# EAGLE board SpecialistEE20 (EAGLE 6.4)
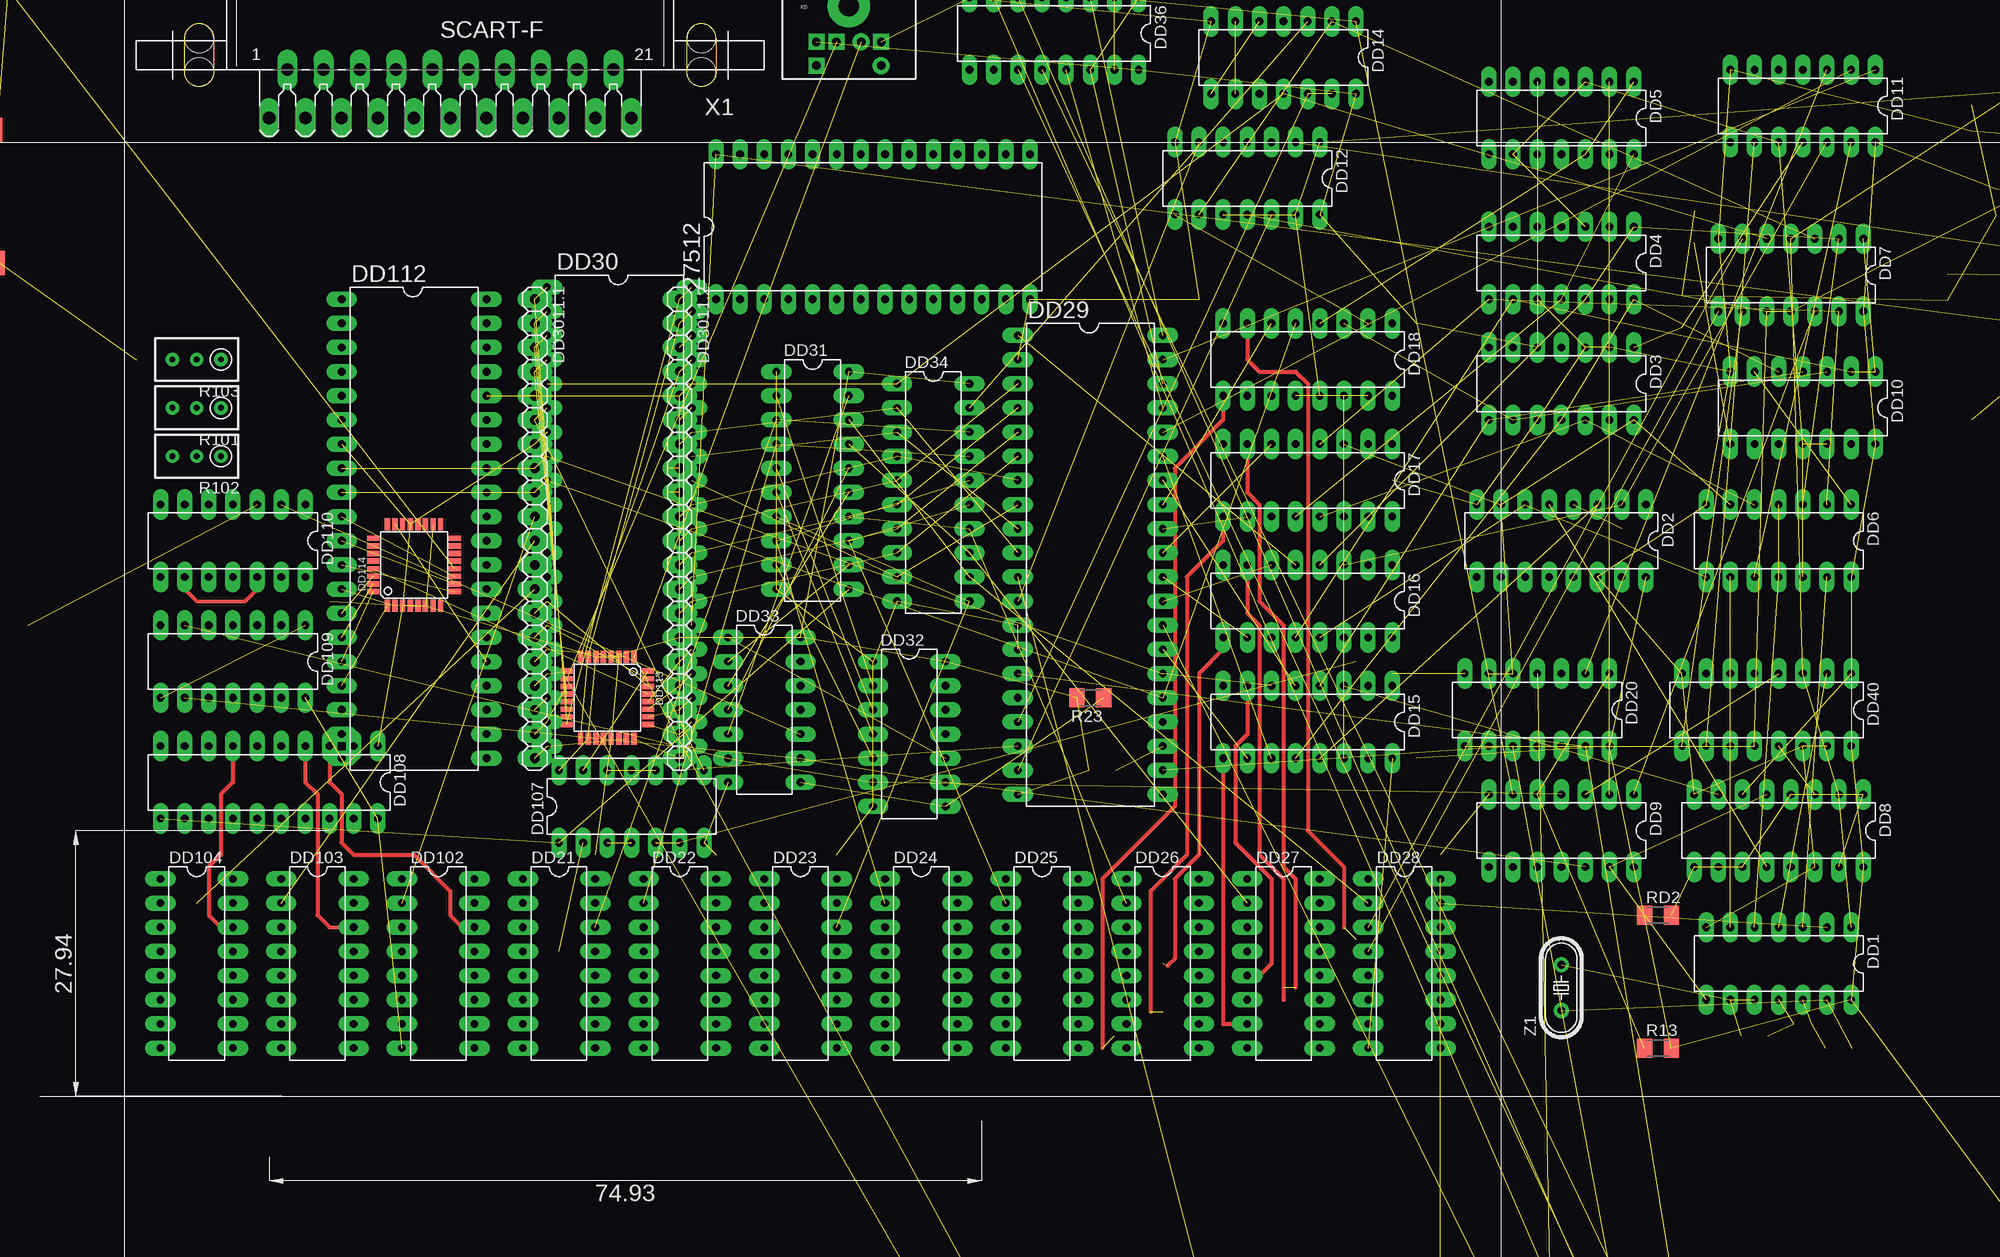
[diagram p0: board, top side]
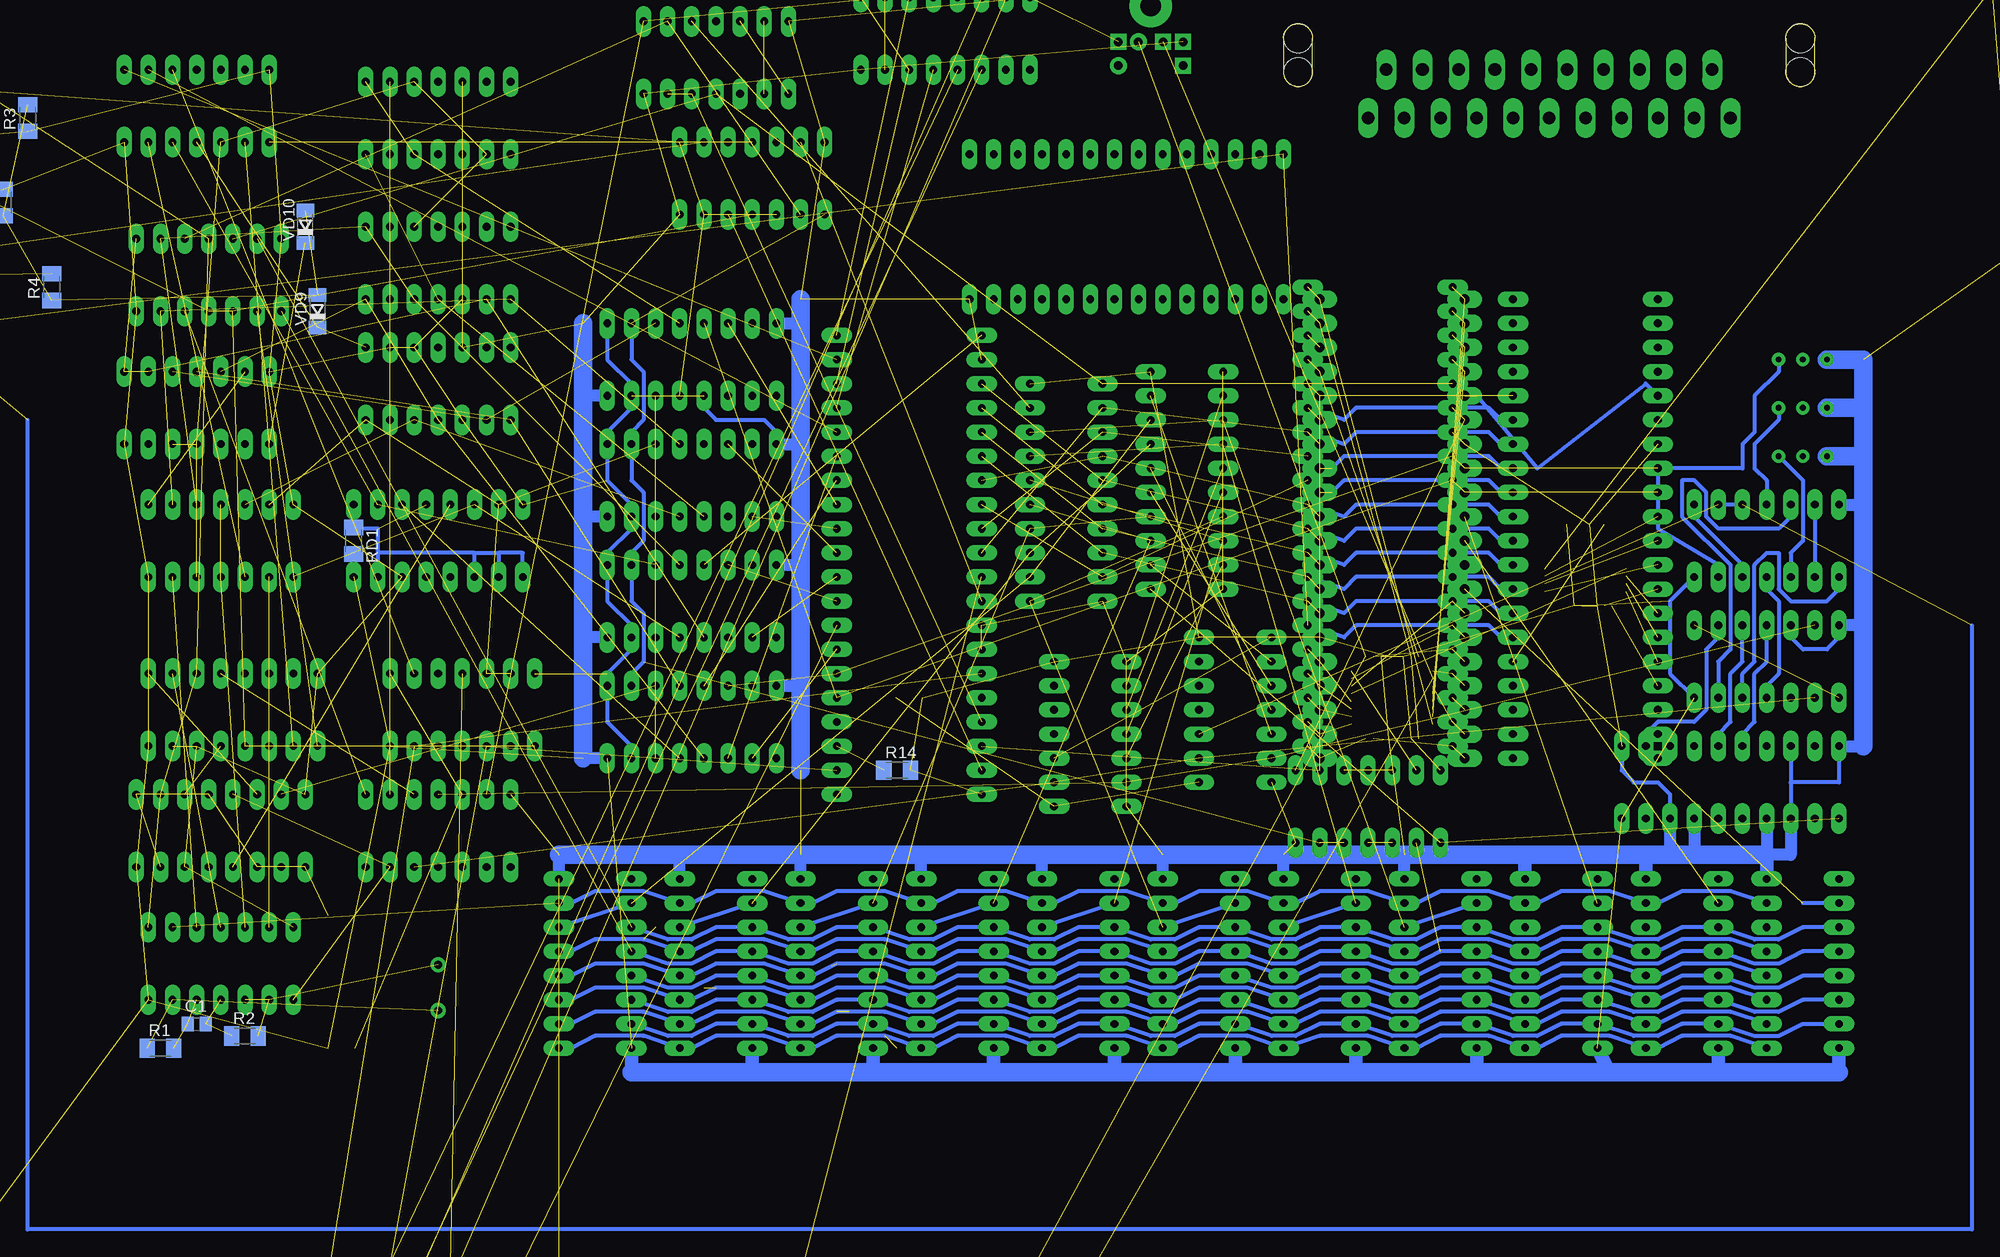
[diagram p1: board, bottom side, seen from below]

Size 55.88 x 6.6 mm. Coordinates in mm from the lower left corner, seen from the top.
Copper layers (1*16): Top 0.035mm / dielectric 1.5mm / Bottom 0.035mm
Design rules "speccy2007": minimum track width 10mil, minimum drill 24mil, track to track 8mil, track to pad 8mil, pad to pad 8mil, via to via 8mil, smd to smd 8mil, copper to edge 40mil, drill to drill 7mil, minimum pad ring 0.4mm, minimum via ring 8mil, stop-mask expansion 4mil, vias tented up to drill 0mil, thermal gap 10mil

## Footprints (pad centres in the part's own frame; a part is rotated, then mirrored left to right if it is on the bottom)
DIL28 = drill 0.813 long: 1 -16.51,-7.62; 2 -13.97,-7.62; 3 -11.43,-7.62; 4 -8.89,-7.62; 5 -6.35,-7.62; 6 -3.81,-7.62; 7 -1.27,-7.62; 8 1.27,-7.62; 9 3.81,-7.62; 10 6.35,-7.62; 11 8.89,-7.62; 12 11.43,-7.62; 13 13.97,-7.62; 14 16.51,-7.62; 15 16.51,7.62; 16 13.97,7.62; 17 11.43,7.62; 18 8.89,7.62; 19 6.35,7.62; 20 3.81,7.62; 21 1.27,7.62; 22 -1.27,7.62; 23 -3.81,7.62; 24 -6.35,7.62; 25 -8.89,7.62; 26 -11.43,7.62; 27 -13.97,7.62; 28 -16.51,7.62
C0805 = smd 1.3 x 1.5: 1 -0.95,0; 2 0.95,0
E2,5-5 = drill 0.813 pad 1.6: + -1.27,0 | drill 0.813 pad 1.6 octagon: - 1.27,0
C1206 = smd 1.6 x 1.8: 1 -1.4,0; 2 1.4,0
DIL14 = drill 0.813 long: 1 -7.62,-3.81; 2 -5.08,-3.81; 3 -2.54,-3.81; 4 0,-3.81; 5 2.54,-3.81; 6 5.08,-3.81; 7 7.62,-3.81; 8 7.62,3.81; 9 5.08,3.81; 10 2.54,3.81; 11 0,3.81; 12 -2.54,3.81; 13 -5.08,3.81; 14 -7.62,3.81
DIL16 = drill 0.813 long: 1 -8.89,-3.81; 2 -6.35,-3.81; 3 -3.81,-3.81; 4 -1.27,-3.81; 5 1.27,-3.81; 6 3.81,-3.81; 7 6.35,-3.81; 8 8.89,-3.81; 9 8.89,3.81; 10 6.35,3.81; 11 3.81,3.81; 12 1.27,3.81; 13 -1.27,3.81; 14 -3.81,3.81; 15 -6.35,3.81; 16 -8.89,3.81
DIL40 = drill 0.813 long: 1 -24.13,-7.62; 2 -21.59,-7.62; 3 -19.05,-7.62; 4 -16.51,-7.62; 5 -13.97,-7.62; 6 -11.43,-7.62; 7 -8.89,-7.62; 8 -6.35,-7.62; 9 -3.81,-7.62; 10 -1.27,-7.62; 11 1.27,-7.62; 12 3.81,-7.62; 13 6.35,-7.62; 14 8.89,-7.62; 15 11.43,-7.62; 16 13.97,-7.62; 17 16.51,-7.62; 18 19.05,-7.62; 19 21.59,-7.62; 20 24.13,-7.62; 21 24.13,7.62; 22 21.59,7.62; 23 19.05,7.62; 24 16.51,7.62; 25 13.97,7.62; 26 11.43,7.62; 27 8.89,7.62; 28 6.35,7.62; 29 3.81,7.62; 30 1.27,7.62; 31 -1.27,7.62; 32 -3.81,7.62; 33 -6.35,7.62; 34 -8.89,7.62; 35 -11.43,7.62; 36 -13.97,7.62; 37 -16.51,7.62; 38 -19.05,7.62; 39 -21.59,7.62; 40 -24.13,7.62
DIL20 = drill 0.813 long: 1 -11.43,-3.81; 2 -8.89,-3.81; 3 -6.35,-3.81; 4 -3.81,-3.81; 5 -1.27,-3.81; 6 1.27,-3.81; 7 3.81,-3.81; 8 6.35,-3.81; 9 8.89,-3.81; 10 11.43,-3.81; 11 11.43,3.81; 12 8.89,3.81; 13 6.35,3.81; 14 3.81,3.81; 15 1.27,3.81; 16 -1.27,3.81; 17 -3.81,3.81; 18 -6.35,3.81; 19 -8.89,3.81; 20 -11.43,3.81
DIL24 = drill 0.813 long: 1 -13.97,-7.62; 2 -11.43,-7.62; 3 -8.89,-7.62; 4 -6.35,-7.62; 5 -3.81,-7.62; 6 -1.27,-7.62; 7 1.27,-7.62; 8 3.81,-7.62; 9 6.35,-7.62; 10 8.89,-7.62; 11 11.43,-7.62; 12 13.97,-7.62; 13 13.97,7.62; 14 11.43,7.62; 15 8.89,7.62; 16 6.35,7.62; 17 3.81,7.62; 18 1.27,7.62; 19 -1.27,7.62; 20 -3.81,7.62; 21 -6.35,7.62; 22 -8.89,7.62; 23 -11.43,7.62; 24 -13.97,7.62
TQFP32-08 = smd 1.27 x 0.559: 1 -4.293,2.8; 2 -4.293,2; 3 -4.293,1.2; 4 -4.293,0.4; 5 -4.293,-0.4; 6 -4.293,-1.2; 7 -4.293,-2; 8 -4.293,-2.8; 17 4.293,-2.8; 18 4.293,-2; 19 4.293,-1.2; 20 4.293,-0.4; 21 4.293,0.4; 22 4.293,1.2; 23 4.293,2; 24 4.293,2.8 | smd 0.559 x 1.27: 9 -2.8,-4.293; 10 -2,-4.293; 11 -1.2,-4.293; 12 -0.4,-4.293; 13 0.4,-4.293; 14 1.2,-4.293; 15 2,-4.293; 16 2.8,-4.293; 25 2.8,4.293; 26 2,4.293; 27 1.2,4.293; 28 0.4,4.293; 29 -0.4,4.293; 30 -1.2,4.293; 31 -2,4.293; 32 -2.8,4.293
1X20 = drill 1.016 long: 1 -24.13,0; 2 -21.59,0; 3 -19.05,0; 4 -16.51,0; 5 -13.97,0; 6 -11.43,0; 7 -8.89,0; 8 -6.35,0; 9 -3.81,0; 10 -1.27,0; 11 1.27,0; 12 3.81,0; 13 6.35,0; 14 8.89,0; 15 11.43,0; 16 13.97,0; 17 16.51,0; 18 19.05,0; 19 21.59,0; 20 24.13,0
SDCMF-10915W010 = smd 0.711 x 1.422: 1 7.366,13.462; 2 4.826,13.462; 3 2.286,13.462; 4 -0.254,13.462; 5 -2.794,13.462; 6 -5.334,13.462; 7 -7.874,13.462; 8 -9.398,13.462; 9 9.906,13.462; 10 -11.938,13.462; 11 -10.668,13.462 | smd 1.27 x 2.54: M1 12.43,11.43; M2 13.97,-2.54; M3 -13.208,-2.54; M4 -13.446,11.43 | hole 1.6: 9.906,10.414 | hole 1.1: -11.176,10.414
1X01 = drill 1.016 octagon: 1 0,0
MINI-DIN6 = drill 0.9 pad 1.676 square: 1 -1.3,-8.5; 3 -3.4,-8.5; 4 3.4,-8.5; 5 -3.4,-11 | drill 0.9 pad 1.778: 2 1.3,-8.5; 6 3.4,-11 | drill 2.2 pad 4.5: GND 0,-4.7
LED5MM = drill 0.813 octagon: A -1.27,0; K 1.27,0
M1206 = smd 1.6 x 2: 1 -1.4,0; 2 1.4,0
0411/15 = drill 0.914 octagon: 1 -7.62,0; 2 7.62,0
RTRIM3296W = drill 0.61: 1 0,-2.54; 2 0,0; 3 0,2.54
M0805 = smd 1.3 x 1.6: 1 -0.95,0; 2 0.95,0
PCB-MAIN = hole 7: 203.5,30.5; 57.5,30.5; 203.5,132; 57.5,132 | hole 12: 79.5,76.5; 184,76.5
SWITCH9X4 = drill 0.8 pad 2.184: 10 -1.587,0; 11 -1.587,2.54; 12 -1.587,-2.54; 20 1.587,0; 21 1.587,2.54; 22 1.587,-2.54
SOD80C = smd 1.4 x 1.8: A 1.7,0; C -1.7,0
DO41-10 = drill 1.118: A 5.08,0; C -5.08,0
SCART-F = drill 1.321 long: 1 19.05,5.08; 2 17.145,0; 3 15.24,5.08; 4 13.335,0; 5 11.43,5.08; 6 9.525,0; 7 7.62,5.08; 8 5.715,0; 9 3.81,5.08; 10 1.905,0; 11 0,5.08; 12 -1.905,0; 13 -3.81,5.08; 14 -5.715,0; 15 -7.62,5.08; 16 -9.525,0; 17 -11.43,5.08; 18 -13.335,0; 19 -15.24,5.08; 20 -17.145,0; 21 -19.05,5.08 | hole 3.023: 26.416,0.254; 26.416,-3.302; -26.416,0.254; -26.416,-3.302
HC49/S = drill 0.813: 1 -2.413,0; 2 2.413,0

## Placement (x,y rotation side)
27512  [DIL28]  72.39,-14.73 0 top  (outside the outline)
C1  300  [C0805]  170.18,-98.55 0 bottom  (outside the outline)
C3  2m2  [E2,5-5]  138.43,-126.49 270 top  (outside the outline)
C4  [C1206]  106.68,-126.49 270 top  (outside the outline)
C4'  [C1206]  111.76,-126.49 270 top  (outside the outline)
C5  100  [C0805]  203.2,-5.84 0 bottom  (outside the outline)
C6  68  [C0805]  203.2,6.86 0 bottom  (outside the outline)
C7  100m  [E2,5-5]  204.47,-18.54 0 top  (outside the outline)
C10  2m2  [E2,5-5]  196.85,-28.7 0 top  (outside the outline)
C11  22n  [C0805]  195.58,-19.81 0 top  (outside the outline)
DD1  К155ЛН1  [DIL14]  167.64,-92.2 180 top  (outside the outline)
DD2  К155ИЕ7  [DIL16]  144.78,-47.75 180 top  (outside the outline)
DD3  К155ИЕ5  [DIL14]  144.78,-31.24 180 top  (outside the outline)
DD4  К155ИЕ5  [DIL14]  144.78,-18.54 180 top  (outside the outline)
DD5  К155ИЕ5  [DIL14]  144.78,-3.3 180 top  (outside the outline)
DD6  К155ЛЕ1  [DIL14]  167.64,-47.75 180 top  (outside the outline)
DD7  К155ЛА4  [DIL14]  168.91,-19.81 180 top  (outside the outline)
DD8  К155ИЕ7  [DIL16]  167.64,-78.23 180 top  (outside the outline)
DD9  К155ЛН1  [DIL14]  144.78,-78.23 180 top  (outside the outline)
DD10  К155ЛА2  [DIL14]  170.18,-33.78 180 top  (outside the outline)
DD11  К155ЛА3  [DIL14]  170.18,-2.03 180 top  (outside the outline)
DD12  К155ТМ2  [DIL14]  111.76,-9.65 180 top  (outside the outline)
DD14  К155ЛА3  [DIL14]  115.57,3.05 180 top  (outside the outline)
DD15  К155КП2  [DIL16]  118.11,-66.8 180 top  (outside the outline)
DD16  К155КП2  [DIL16]  118.11,-54.1 180 top  (outside the outline)
DD17  К155КП2  [DIL16]  118.11,-41.4 180 top  (outside the outline)
DD18  К155КП2  [DIL16]  118.11,-28.7 180 top  (outside the outline)
DD19  К155ЛП10  [DIL16]  266.7,-273.81 180 top  (outside the outline)
DD20  К155ЛА8  [DIL14]  142.24,-65.53 180 top  (outside the outline)
DD21  КР565РУ5  [DIL16]  39.37,-92.2 270 top  (outside the outline)
DD22  КР565РУ5  [DIL16]  52.07,-92.2 270 top  (outside the outline)
DD23  КР565РУ5  [DIL16]  64.77,-92.2 270 top  (outside the outline)
DD24  КР565РУ5  [DIL16]  77.47,-92.2 270 top  (outside the outline)
DD25  КР565РУ5  [DIL16]  90.17,-92.2 270 top  (outside the outline)
DD26  КР565РУ5  [DIL16]  102.87,-92.2 270 top  (outside the outline)
DD27  КР565РУ5  [DIL16]  115.57,-92.2 270 top  (outside the outline)
DD28  КР565РУ5  [DIL16]  128.27,-92.2 270 top  (outside the outline)
DD29  КР580ВМ80  [DIL40]  95.25,-50.29 270 top  (outside the outline)
DD30  КР580ВВ55  [DIL40]  45.72,-45.21 270 top  (outside the outline)
DD31  К555ИР22  [DIL20]  66.04,-41.4 270 top  (outside the outline)
DD32  К555ИР16  [DIL14]  76.2,-68.07 270 top  (outside the outline)
DD33  К555ИР16  [DIL14]  60.96,-65.53 270 top  (outside the outline)
DD34  К555АП6  [DIL20]  78.74,-42.67 270 top  (outside the outline)
DD36  К155ИД4  [DIL16]  91.44,5.59 180 top  (outside the outline)
DD37  К573РФ2  [DIL24]  218.44,-264.92 90 top  (outside the outline)
DD38  К573РФ2  [DIL24]  220.98,-230.63 90 top  (outside the outline)
DD39  К573РФ4  [DIL28]  241.3,-264.92 270 top  (outside the outline)
DD40  К155ИД4  [DIL16]  166.37,-65.53 180 top  (outside the outline)
DD45  К555ИЕ19  [DIL14]  227.33,-21.08 90 top  (outside the outline)
DD102  КР565РУ5  [DIL16]  26.67,-92.2 270 top  (outside the outline)
DD103  КР565РУ5  [DIL16]  13.97,-92.2 270 top  (outside the outline)
DD104  КР565РУ5  [DIL16]  1.27,-92.2 270 top  (outside the outline)
DD107  К155ЛЕ1  [DIL14]  46.99,-75.69 0 top  (outside the outline)
DD108  К555ИР22  [DIL20]  8.89,-73.15 180 top  (outside the outline)
DD109  К555ИР16  [DIL14]  5.08,-60.45 180 top  (outside the outline)
DD110  К155ЛЕ1  [DIL14]  5.08,-47.75 180 top  (outside the outline)
DD112  КР580ВВ55  [DIL40]  24.13,-46.48 270 top  (outside the outline)
DD113  MEGA8-AI  [TQFP32-08]  44.45,-64.26 270 top  (outside the outline)
DD114  MEGA8-AI  [TQFP32-08]  24.13,-50.29 90 top  (outside the outline)
DD3011.1  [1X20]  36.83,-46.48 270 top  (outside the outline)
DD3011.2  [1X20]  52.07,-46.48 270 top  (outside the outline)
J1  [SDCMF-10915W010]  -33.02,-7.11 180 top  (outside the outline)
JP1  [1X01]  189.23,48.77 180 top  (outside the outline)
KB  MINI-DIN6  [MINI-DIN6]  69.85,13.21 0 top  (outside the outline)
LED1  [LED5MM]  -19.05,20.83 0 top  (outside the outline)
R1  390  [M1206]  173.99,-101.09 0 bottom  (outside the outline)
R2  390  [M1206]  165.1,-99.82 0 bottom  (outside the outline)
R3  200  [M1206]  187.96,-3.3 90 bottom  (outside the outline)
R4  150  [M1206]  185.42,-21.08 90 bottom  (outside the outline)
R5  430*  [M1206]  190.5,-12.19 90 bottom  (outside the outline)
R6  390r  [0411/15]  143.51,-131.57 270 top  (outside the outline)
R9  2k  [M1206]  242.57,-309.37 270 bottom  (outside the outline)
R10  2k  [M1206]  204.47,-12.19 0 bottom  (outside the outline)
R11  2k  [M1206]  204.47,0.51 0 bottom  (outside the outline)
R13  2k  [M1206]  154.94,-101.09 0 top  (outside the outline)
R14  2k  [M1206]  96.52,-71.88 0 bottom  (outside the outline)
R23  2k  [M1206]  95.25,-64.26 180 top  (outside the outline)
R47  390r 0.5w  [0411/15]  156.21,-131.57 270 top  (outside the outline)
R48  390r 0.5w  [0411/15]  149.86,-131.57 270 top  (outside the outline)
R101  [RTRIM3296W]  1.27,-33.78 90 top  (outside the outline)
R102  [RTRIM3296W]  1.27,-38.86 90 top  (outside the outline)
R103  [RTRIM3296W]  1.27,-28.7 90 top  (outside the outline)
R105  4k7  [M0805]  176.53,-300.48 0 bottom  (outside the outline)
R106  4k7  [M0805]  177.8,-301.75 0 bottom  (outside the outline)
R107  560  [M0805]  -19.05,11.94 90 bottom  (outside the outline)
RD1  2k  [M1206]  153.67,-47.75 270 bottom  (outside the outline)
RD2  2k  [M1206]  154.94,-87.12 0 top  (outside the outline)
U$1  [PCB-MAIN]  400.05,-140.46 0 top  (outside the outline)
U$2  SWITCH9X4  [SWITCH9X4]  -43.18,-27.43 0 top  (outside the outline)
VD1  [SOD80C]  132.08,-126.49 270 top  (outside the outline)
VD2  [SOD80C]  127,-126.49 270 top  (outside the outline)
VD3  [SOD80C]  121.92,-126.49 270 top  (outside the outline)
VD3*  [SOD80C]  116.84,-126.49 270 top  (outside the outline)
VD4  [SOD80C]  222.25,-309.37 270 bottom  (outside the outline)
VD5  [SOD80C]  227.33,-309.37 270 bottom  (outside the outline)
VD6  [SOD80C]  232.41,-309.37 270 bottom  (outside the outline)
VD7  [SOD80C]  237.49,-309.37 270 bottom  (outside the outline)
VD8  1N4004  [DO41-10]  196.85,-130.3 90 top  (outside the outline)
VD9  [SOD80C]  157.48,-23.62 90 bottom  (outside the outline)
VD10  [SOD80C]  158.75,-14.73 90 bottom  (outside the outline)
X1  SCART-F  [SCART-F]  27.94,1.78 180 top
Z1  8000  [HC49/S]  144.78,-94.74 90 top  (outside the outline)

## Library data of the parts
27512 DD21-DD28 DD37-DD39 DD102-DD104 = memory
C1 C3 C4 C4' C5-C7 C10 C11 R1-R6 R9-R11 R13 R14 R23 R47 R48 R101-R103 R105-R107 RD1 RD2 = rcl
DD1-DD12 DD14-DD20 DD31-DD34 DD36 DD40 DD45 DD107-DD110 = 74xx-eu
DD29 DD30 DD112 = micro-intel; OC_FARNELL: unknown; OC_NEWARK: unknown
DD113 DD114 = atmel; MPN: ATMEGA8-16AU; OC_FARNELL: 9171371; OC_NEWARK: 73M8863
DD3011.1 DD3011.2 JP1 = Разъёмы штырьковые 2.54мм
J1 KB = Speccy
LED1 = led
U$1 = simvol-ik
U$2 = ESR_NM8032
VD1-VD3 VD3* VD4-VD10 = diode
X1 = con-hirschmann; OC_FARNELL: unknown; OC_NEWARK: unknown
Z1 = crystal; OC_FARNELL: 1667008; OC_NEWARK: unknown

## Nets
!CAS: DD1.2 DD21.15 DD22.15 DD23.15 DD24.15 DD25.15 DD26.15 DD27.15 DD28.15 DD102.15 DD103.15 DD104.15
!G19A: DD7.3 DD12.9 DD14.2
!G19B: DD107.3 DD107.4
!R: DD114.24
!RAS: DD7.8 DD21.4 DD22.4 DD23.4 DD24.4 DD25.4 DD26.4 DD27.4 DD28.4 DD102.4 DD103.4 DD104.4 DD107.2
!RD: DD7.5 DD14.11 DD30.5 DD34.1 DD112.5 DD3011.1.5
!RESIN: DD113.29 DD114.29
!U6: DD112.6
!U7: DD30.6 DD107.8 DD3011.1.6
!WE: DD7.6 DD21.3 DD22.3 DD23.3 DD24.3 DD25.3 DD26.3 DD27.3 DD28.3 DD102.3 DD103.3 DD104.3
!WR: DD29.18 DD30.36 DD107.9 DD112.36 DD3011.2.5
+5V: DD1.14 DD2.16 DD3.5 DD4.5 DD5.5 DD6.14 DD7.14 DD8.16 DD9.14 DD10.14 DD11.14 DD12.14 DD14.14 DD15.16 DD16.16 DD17.16 DD18.16 DD19.16 DD20.14 DD21.8 DD22.8 DD23.8 DD24.8 DD25.8 DD26.8 DD27.8 DD28.8 DD29.20 DD31.20 DD32.14 DD33.14 DD34.20 DD36.16 DD40.16 DD102.8 DD103.8 DD104.8 DD107.14 DD108.20 DD109.14 DD110.14 DD113.4 DD113.6 DD113.18 DD114.4 DD114.6 DD114.18 DD3011.2.15 KB.3 R5.2 R9.2 R10.2 R11.2 R13.2 R14.2 R23.2 R105.2 R106.2 RD1.2 RD2.1 VD8.A
+12V: DD29.28 R6.2 R47.2 R48.2 VD8.C
-5V: C4'.1 C4.1 DD29.11 VD2.A VD3*.A VD3.A
A0: DD18.5 DD29.25 DD30.9 DD112.9 DD3011.1.9
A1: DD15.6 DD29.26 DD30.8 DD112.8 DD3011.1.8
A2: DD15.10 DD29.27
A3: DD16.6 DD29.29
A4: DD16.10 DD29.30
A5: DD17.6 DD29.31
A6: DD17.10 DD29.32
A7: DD18.6 DD29.33
A8: DD15.5 DD29.34
A9: DD15.11 DD29.35
A10: DD16.5 DD29.1
A11: DD29.40 DD36.3
A12: DD29.37 DD36.13
A13: DD29.38 DD36.1 DD36.14
A14: DD11.1 DD29.39
A15: DD11.2 DD29.36
A'11: DD16.11
A'12: DD17.5
A'13: DD17.11
A'14: DD18.10
A'15: DD18.11
B: DD104.2 DD3011.1.13
B0: DD104.14 DD108.7
CLK: DD9.12 DD32.9 DD33.9 DD109.9
CRG: DD31.11 DD107.1 DD108.11
CS: DD114.14
D0: DD29.10 DD30.34 DD34.2 DD112.34 DD3011.2.7
D1: DD29.9 DD30.33 DD34.3 DD112.33 DD3011.2.8
D2: DD29.8 DD30.32 DD34.9 DD112.32 DD3011.2.9
D3: DD29.7 DD30.31 DD34.4 DD112.31 DD3011.2.10
D4: DD29.3 DD30.30 DD34.5 DD112.30 DD3011.2.11
D5: DD29.4 DD30.29 DD34.6 DD112.29 DD3011.2.12
D6: DD29.5 DD30.28 DD34.7 DD112.28 DD3011.2.13
D7: DD29.6 DD30.27 DD34.8 DD112.27 DD3011.2.14
DD9DD14: DD9.6 DD14.1 DD36.2 DD36.15
F1: DD20.10 DD29.22 R48.1
F2: DD20.13 DD29.15 R47.1
G: DD103.2 DD3011.1.11
G0: DD103.14 DD108.4
G1: DD8.7 DD15.3
G2: DD2.3 DD15.13
G3: DD2.2 DD11.12 DD16.3
G4: DD2.6 DD6.8 DD16.13
G5: DD2.7 DD3.14 DD6.6 DD17.3 DD20.5 DD20.6
G6: DD3.12 DD6.5 DD17.13
G7: DD3.9 DD10.3 DD18.3
G8: DD3.8 DD10.4 DD15.4
G9: DD3.11 DD4.14 DD10.5 DD15.12
G10: DD4.1 DD4.12 DD6.3 DD7.2 DD16.4
G11: DD4.9 DD7.1 DD10.1 DD10.2 DD16.12
G12: DD4.8 DD6.2 DD7.13 DD17.4
G13: DD4.11 DD5.14 DD17.12
G14: DD5.1 DD5.12 DD18.4
G15: C6.1 DD1.1 DD7.4 DD8.2 DD40.3
G16: DD4.3 DD5.3 DD5.9 DD6.12 DD10.11 DD10.12 DD11.10
G17: DD11.9 DD20.12 DD40.10
G18: C5.1 DD7.10 DD7.11 DD12.11 DD20.8 DD20.9 DD40.12
G19: DD12.8 DD15.2 DD16.2 DD17.2 DD18.2 DD107.5 DD107.6
GND: 27512.14 C4'.2 C4.2 C5.2 C6.2 C7.- DD1.7 DD2.8 DD2.14 DD3.2 DD3.3 DD3.10 DD4.10 DD5.10 DD6.7 DD7.7 DD8.8 DD8.14 DD9.7 DD10.7 DD11.7 DD12.7 DD14.7 DD15.1 DD15.8 DD15.15 DD16.1 DD16.8 DD16.15 DD17.1 DD17.8 DD17.15 DD18.1 DD18.8 DD18.12 DD18.15 DD19.8 DD20.7 DD21.16 DD22.16 DD23.16 DD24.16 DD25.16 DD26.16 DD27.16 DD28.16 DD29.2 DD29.13 DD29.14 DD30.7 DD31.1 DD31.10 DD32.1 DD32.7 DD33.7 DD34.10 DD36.8 DD37.12 DD38.12 DD39.14 DD40.8 DD40.14 DD40.15 DD45.7 DD102.16 DD103.16 DD104.16 DD107.7 DD108.1 DD108.8 DD108.10 DD108.13 DD108.14 DD108.17 DD108.18 DD109.5 DD109.7 DD110.7 DD112.7 DD113.3 DD113.5 DD113.21 DD114.3 DD114.5 DD114.21 DD3011.1.7 J1.M1 J1.M2 J1.M3 J1.M4 KB.4 LED1.K R3.1 R101.3 R102.3 R103.3 VD1.C VD3*.C VD3.C
K1: DD30.1 DD113.15 DD3011.1.1
K2: DD30.2 DD113.14 DD3011.1.2
K3: DD30.3 DD113.13 DD3011.1.3
K4: DD30.4 DD113.12 DD3011.1.4
K5: DD30.40 DD113.16 DD3011.2.1
K6: DD30.39 DD113.7 DD113.17 DD3011.2.2
K7: DD30.38 DD3011.2.3
K8: DD30.37 DD113.8 DD3011.2.4
K9: DD30.25 DD113.28 DD3011.2.16
K10: DD30.24 DD113.27 DD3011.2.17
K11: DD30.23 DD113.26 DD3011.2.18
K12: DD30.22 DD113.25 DD3011.2.19
K13: DD30.14 DD113.30 DD3011.1.14
K14: DD30.15 DD113.31 DD3011.1.15
K15: DD30.16 DD113.2 DD3011.1.16
K16: DD30.17 DD113.9 DD3011.1.17
K17: DD30.21 DD113.24 DD3011.2.20
K18: DD30.20 DD113.23 DD3011.1.20
K19: DD30.19 DD113.11 DD3011.1.19
K20: C7.+ DD12.2 R10.1
K26: DD30.11
K27: DD30.18 DD3011.1.18
LED: DD114.12 R107.1
MA0: DD15.7 DD21.5 DD22.5 DD23.5 DD24.5 DD25.5 DD26.5 DD27.5 DD28.5 DD102.5 DD103.5 DD104.5
MA1: DD15.9 DD21.7 DD22.7 DD23.7 DD24.7 DD25.7 DD26.7 DD27.7 DD28.7 DD102.7 DD103.7 DD104.7
MA2: DD16.7 DD21.6 DD22.6 DD23.6 DD24.6 DD25.6 DD26.6 DD27.6 DD28.6 DD102.6 DD103.6 DD104.6
MA3: DD16.9 DD21.12 DD22.12 DD23.12 DD24.12 DD25.12 DD26.12 DD27.12 DD28.12 DD102.12 DD103.12 DD104.12
MA4: DD17.7 DD21.11 DD22.11 DD23.11 DD24.11 DD25.11 DD26.11 DD27.11 DD28.11 DD102.11 DD103.11 DD104.11
MA5: DD17.9 DD21.10 DD22.10 DD23.10 DD24.10 DD25.10 DD26.10 DD27.10 DD28.10 DD102.10 DD103.10 DD104.10
MA6: DD18.7 DD21.13 DD22.13 DD23.13 DD24.13 DD25.13 DD26.13 DD27.13 DD28.13 DD102.13 DD103.13 DD104.13
MA7: DD18.9 DD21.9 DD22.9 DD23.9 DD24.9 DD25.9 DD26.9 DD27.9 DD28.9 DD102.9 DD103.9 DD104.9
MD0: DD21.2 DD21.14 DD31.3 DD34.18
MD1: DD22.2 DD22.14 DD31.4 DD34.17
MD2: DD23.2 DD23.14 DD31.7 DD34.11
MD3: DD24.2 DD24.14 DD31.8 DD34.16
MD4: DD25.2 DD25.14 DD31.13 DD34.15
MD5: DD26.2 DD26.14 DD31.14 DD34.14
MD6: DD27.2 DD27.14 DD31.17 DD34.13
MD7: DD28.2 DD28.14 DD31.18 DD34.12
MISO: DD114.16
MOSI: DD114.15
N$1: DD6.10 DD11.13
N$2: DD1.5 DD6.4 DD6.11
N$3: DD1.13 R1.1 Z1.1
N$4: DD9.3 DD40.4
N$5: C1.1 DD1.12 R1.2
N$6: DD1.9 DD1.10 R2.2 Z1.2
N$7: C1.2 DD1.11 R2.1
N$8: DD1.8 DD8.5 DD9.13
N$9: DD36.7 VD4.C
N$10: DD36.6 VD5.C
N$11: DD2.5 DD8.12
N$12: DD6.1 DD10.6
N$13: DD1.6 DD6.9
N$14: DD1.3 DD6.13
N$15: DD36.11 VD6.C
N$16: DD4.2 DD5.2 DD9.2
N$17: DD36.12 VD7.C
N$18: R9.1 VD4.A VD5.A VD6.A VD7.A
N$19: DD7.9 DD20.11 DD40.9
N$20: DD8.3 DD40.13
N$21: C3.+ DD20.4 R6.1
N$22: C3.- VD1.A VD2.C
N$23: DD8.6 DD40.1
N$24: DD1.4 DD40.2
N$25: DD10.8 VD10.C
N$26: DD3.1 DD11.11 VD9.C
N$27: R3.2 R4.1 R5.1 VD9.A VD10.A
N$28: DD32.10 DD33.1
N$29: DD2.1 DD2.4 DD2.9 DD2.10 DD2.11 DD2.15 RD1.1
N$30: DD45.3
N$31: DD12.1 DD12.4 DD12.10 DD12.13 DD18.13 R11.1
N$32: DD45.6 DD45.13
N$33: C10.- C11.2 JP1.1
N$34: DD11.8 DD12.3
N$35: DD113.1 KB.2 R106.1
N$36: DD14.5 DD14.8
N$37: DD7.12 DD9.1
N$38: DD8.1 DD8.4 DD8.9 DD8.10 DD8.11 DD8.15 RD2.2
N$39: DD113.10 KB.1 R105.1
N$40: DD107.10 DD107.11 DD107.12
N$41: DD15.14 DD16.14 DD17.14 DD18.14
N$42: DD110.1 DD110.6 DD110.9 DD110.12
N$43: DD108.2 DD109.2
N$44: DD11.3 DD20.2
N$45: DD108.5 DD109.3
N$46: DD108.6 DD109.4
N$47: DD45.4
N$48: LED1.A R107.2
N$49: DD32.8 DD33.8 R23.1
N$50: DD109.13 DD110.5
N$51: DD109.12 DD110.8
N$52: DD109.11 DD110.11
N$53: DD9.5 DD20.1 R13.1
N$54: DD110.4 R101.1
N$55: DD110.10 R102.1
N$56: DD110.13 R103.1
N$57: DD14.6 DD14.9
N$58: R101.2
N$59: R102.2
N$60: R103.2
N$61: DD45.5
N$62: DD45.11
N$63: DD45.10
N$64: DD45.1
N$65: DD45.2 DD45.12
N$66: DD29.23 R14.1
N$69: DD14.3 DD34.19
P1: DD112.4
P2: DD112.3
P3: DD112.2
P4: DD112.1
P5: DD112.40
P6: DD112.39
P7: DD112.38
P8: DD112.37
P9: DD112.18
P10: DD112.19
P11: DD112.20
P12: DD112.21
P13: DD112.22
P14: DD112.23
P15: DD112.24
P16: DD112.25 DD114.23
P17: DD112.14 DD114.30
P18: DD112.15 DD114.31
P19: DD112.16 DD114.32
P20: DD112.17 DD114.1
P21: DD112.13 DD114.2
P22: DD112.12 DD114.9
P23: DD112.11 DD114.10
P24: DD112.10 DD114.11
Q3: DD9.4 DD32.6 DD33.6 DD109.6
R: DD102.2 DD3011.1.10
R0: DD102.14 DD108.3
R2: DD109.1 DD109.8
RD: DD14.12 DD14.13 DD29.17
RES: DD30.35 DD112.35 DD3011.2.6
RES80: DD12.6 DD29.12
SCK: DD114.17
SND: DD3011.1.12
SNY: DD12.12 DD29.19
STRT: DD20.3
TON: DD114.25
U7: DD107.13 DD113.32
VCC: 27512.28 DD30.26 DD37.24 DD38.24 DD39.28 DD45.14 DD112.26
VD0: DD31.2 DD32.2
VD1: DD31.5 DD32.3
VD2: DD31.6 DD32.4
VD3: DD31.9 DD32.5
VD4: DD31.12 DD33.2
VD5: DD31.15 DD33.3
VD6: DD31.16 DD33.4
VD7: DD31.19 DD33.5
VDD: J1.4
VID: C10.+ C11.1 DD33.10 DD110.2 DD110.3 R4.2
VSS1: J1.3
VSS2: J1.6

## Tracks (layer width: path | path; a pad name or v marks a point on that pad's centre or on a via)
!CAS  (1 unrouted)
  Bottom 0.406: DD28.15 130.81,-85.85 128.27,-84.58 123.19,-84.58 DD27.15 118.11,-85.85 115.57,-84.58 110.49,-84.58 DD26.15 105.41,-85.85 102.87,-84.58 97.79,-84.58 DD25.15 92.71,-85.85 90.17,-84.58 85.09,-84.58 DD24.15 80.01,-85.85 77.47,-84.58 72.39,-84.58 DD23.15 67.31,-85.85 64.77,-84.58 59.69,-84.58 DD22.15 54.61,-85.85 52.07,-84.58 46.99,-84.58 DD21.15 41.91,-85.85 39.37,-84.58 34.29,-84.58 DD102.15 29.21,-85.85 26.67,-84.58 21.59,-84.58 DD103.15 16.51,-85.85 13.97,-84.58 8.89,-84.58 DD104.15
!G19A  (2 unrouted)
!G19B  (1 unrouted)
!RAS  (2 unrouted)
  Bottom 0.406: DD28.4 120.65,-92.2 118.11,-92.2 115.57,-90.93 DD27.4 107.95,-92.2 105.41,-92.2 102.87,-90.93 DD26.4 95.25,-92.2 92.71,-92.2 90.17,-90.93 DD25.4 82.55,-92.2 80.01,-92.2 77.47,-90.93 DD24.4 69.85,-92.2 67.31,-92.2 64.77,-90.93 DD23.4 57.15,-92.2 54.61,-92.2 52.07,-90.93 DD22.4 44.45,-92.2 41.91,-92.2 39.37,-90.93 DD21.4 31.75,-92.2 29.21,-92.2 26.67,-90.93 DD102.4 19.05,-92.2 16.51,-92.2 13.97,-90.93 DD103.4 6.35,-92.2 3.81,-92.2 1.27,-90.93 DD104.4
!RD  (4 unrouted)
  Bottom 0.406: DD30.5 35.56,-32.51 29.21,-40.13 17.78,-31.24 DD112.5
!RESIN  (1 unrouted)
!U7  (2 unrouted)
!WE  (1 unrouted)
  Bottom 0.406: DD28.3 120.65,-89.66 118.11,-89.66 115.57,-88.39 DD27.3 107.95,-89.66 105.41,-89.66 102.87,-88.39 DD26.3 95.25,-89.66 92.71,-89.66 90.17,-88.39 DD25.3 82.55,-89.66 80.01,-89.66 77.47,-88.39 DD24.3 69.85,-89.66 67.31,-89.66 64.77,-88.39 DD23.3 57.15,-89.66 54.61,-89.66 52.07,-88.39 DD22.3 44.45,-89.66 41.91,-89.66 39.37,-88.39 DD21.3 31.75,-89.66 29.21,-89.66 26.67,-88.39 DD102.3 19.05,-89.66 16.51,-89.66 13.97,-88.39 DD103.3 6.35,-89.66 3.81,-89.66 1.27,-88.39 DD104.3
!WR  (4 unrouted)
+5V  (45 unrouted)
  Bottom 0.406: RD1.2 DD2.16 | DD110.14 15.24,-54.1 15.24,-61.72 DD109.14
  Bottom 1.27: DD18.16 129.54,-32.51 | DD17.16 129.54,-45.21 | DD16.16 129.54,-57.91 | DD15.16 129.54,-70.61
  Bottom 1.422: DD21.8 35.56,-103.63 | DD22.8 48.26,-103.63 | DD23.8 60.96,-103.63 | DD24.8 73.66,-103.63 | DD25.8 86.36,-103.63 | DD26.8 99.06,-103.63 | DD27.8 111.76,-103.63 | 124.46,-103.63 DD28.8 | DD104.8 -2.54,-103.63 | DD103.8 10.16,-103.63 | DD102.8 21.59,-103.63
  Bottom 1.93: 124.46,-103.63 111.76,-103.63 99.06,-103.63 86.36,-103.63 73.66,-103.63 60.96,-103.63 48.26,-103.63 35.56,-103.63 21.59,-103.63 10.16,-103.63 -2.54,-103.63 | 129.54,-24.89 129.54,-32.51 129.54,-45.21 129.54,-57.91 129.54,-70.61
+12V  (4 unrouted)
-5V  (5 unrouted)
A0  (4 unrouted)
A1  (4 unrouted)
A2  (1 unrouted)
A3  (1 unrouted)
A4  (1 unrouted)
A5  (1 unrouted)
A6  (1 unrouted)
A7  (1 unrouted)
A8  (1 unrouted)
A9  (1 unrouted)
A10  (1 unrouted)
A11  (1 unrouted)
A12  (1 unrouted)
A13  (2 unrouted)
A14  (1 unrouted)
A15  (1 unrouted)
B  (1 unrouted)
  Bottom 0.406: DD104.2 1.27,-85.85
B0
  Top 0.406: DD108.7 5.08,-73.15 3.81,-74.42 3.81,-80.77 2.54,-82.04 2.54,-87.12 3.81,-88.39 DD104.14
CLK  (3 unrouted)
CRG  (2 unrouted)
D0  (3 unrouted)
  Bottom 0.406: DD112.34 33.02,-37.59 34.29,-36.32 48.26,-36.32 49.53,-37.59 DD30.34
D1  (3 unrouted)
  Bottom 0.406: DD112.33 33.02,-40.13 34.29,-38.86 49.53,-38.86 50.8,-40.13 DD30.33
D2  (3 unrouted)
  Bottom 0.406: DD112.32 33.02,-42.67 34.29,-41.4 49.53,-41.4 50.8,-42.67 DD30.32
D3  (3 unrouted)
  Bottom 0.406: DD112.31 33.02,-45.21 34.29,-43.94 48.26,-43.94 49.53,-45.21 DD30.31
D4  (3 unrouted)
  Bottom 0.406: DD112.30 33.02,-47.75 34.29,-46.48 48.26,-46.48 49.53,-47.75 DD30.30
D5  (3 unrouted)
  Bottom 0.406: DD112.29 33.02,-50.29 34.29,-49.02 48.26,-49.02 49.53,-50.29 DD30.29
D6  (3 unrouted)
  Bottom 0.406: DD112.28 33.02,-52.83 34.29,-51.56 48.26,-51.56 49.53,-52.83 DD30.28
D7  (3 unrouted)
  Bottom 0.406: DD112.27 33.02,-55.37 34.29,-54.1 48.26,-54.1 49.53,-55.37 DD30.27
DD9DD14  (3 unrouted)
F1  (2 unrouted)
F2  (2 unrouted)
G  (1 unrouted)
G0
  Top 0.406: DD108.4 12.7,-73.15 13.97,-74.42 13.97,-87.12 15.24,-88.39 DD103.14
G1  (1 unrouted)
G2  (1 unrouted)
G3  (2 unrouted)
G4  (2 unrouted)
G5  (5 unrouted)
G6  (2 unrouted)
G7  (2 unrouted)
G8  (2 unrouted)
G9  (3 unrouted)
G10  (4 unrouted)
G11  (4 unrouted)
G12  (3 unrouted)
G13  (2 unrouted)
G14  (2 unrouted)
G15  (4 unrouted)
G16  (6 unrouted)
G17  (2 unrouted)
G18  (6 unrouted)
G19  (3 unrouted)
  Bottom 0.406: DD18.2 124.46,-28.7 123.19,-29.97 123.19,-35.05 124.46,-36.32 DD17.2 124.46,-41.4 123.19,-42.67 123.19,-47.75 124.46,-49.02 DD16.2 124.46,-54.1 123.19,-55.37 123.19,-60.45 124.46,-61.72 DD15.2
GND  (64 unrouted)
  Bottom 0.406: DD18.1 127,-28.7 124.46,-31.24 DD18.15 124.46,-33.78 127,-36.32 DD17.1 127,-41.4 124.46,-43.94 DD17.15 124.46,-46.48 127,-49.02 DD16.1 127,-54.1 124.46,-56.64 DD16.15 124.46,-59.18 127,-61.72 DD15.1 127,-66.8 124.46,-69.34 DD15.15 | DD18.12 116.84,-33.78 115.57,-35.05 110.49,-35.05 109.22,-36.32 DD17.8 | DD108.8 2.54,-73.15 | 2.54,-73.15 DD108.13 | DD108.10 -2.54,-73.15 2.54,-73.15 | DD108.1 20.32,-71.88 19.05,-73.15 16.51,-73.15 15.24,-74.42 DD108.18 | DD109.7 -2.54,-57.91 -1.27,-59.18 1.27,-59.18 2.54,-57.91 DD109.5
  Bottom 1.27: DD21.16 43.18,-80.77 | DD22.16 55.88,-80.77 | DD23.16 68.58,-80.77 | DD24.16 81.28,-80.77 | DD28.16 132.08,-80.77 | DD27.16 119.38,-80.77 | DD26.16 106.68,-80.77 | DD25.16 93.98,-80.77 | DD15.8 106.68,-62.99 | DD16.8 106.68,-50.29 | DD17.8 106.68,-37.59 | DD18.8 106.68,-24.89 | DD108.18 15.24,-80.77 | DD108.17 12.7,-80.77 | DD108.13 2.54,-80.77 5.08,-80.77 DD108.14 | DD108.10 -5.08,-69.34 | -5.08,-56.64 DD109.7 | DD110.7 -5.08,-43.94
  Bottom 1.422: DD104.16 5.08,-80.77 | DD102.16 30.48,-80.77 | DD103.16 17.78,-80.77
  Bottom 1.93: 132.08,-80.77 119.38,-80.77 106.68,-80.77 93.98,-80.77 81.28,-80.77 68.58,-80.77 55.88,-80.77 43.18,-80.77 30.48,-80.77 17.78,-80.77 15.24,-80.77 12.7,-80.77 5.08,-80.77 | 106.68,-71.88 106.68,-62.99 106.68,-50.29 106.68,-37.59 106.68,-24.89 106.68,-22.35 | -5.08,-69.34 -5.08,-56.64 -5.08,-43.94 -5.08,-38.86 | -5.08,-38.86 R102.3 | R103.3 -5.08,-28.7 -5.08,-33.78 | -5.08,-33.78 -5.08,-38.86 | R101.3 -5.08,-33.78
K1  (2 unrouted)
K2  (2 unrouted)
K3  (2 unrouted)
K4  (2 unrouted)
K5  (2 unrouted)
K6  (3 unrouted)
K7  (1 unrouted)
K8  (2 unrouted)
K9  (2 unrouted)
K10  (2 unrouted)
K11  (2 unrouted)
K12  (2 unrouted)
K13  (2 unrouted)
K14  (2 unrouted)
K15  (2 unrouted)
K16  (2 unrouted)
K17  (2 unrouted)
K18  (2 unrouted)
K19  (2 unrouted)
K20  (2 unrouted)
K27  (1 unrouted)
LED  (1 unrouted)
MA0
  Top 0.406: DD15.7 111.76,-68.07 110.49,-69.34 110.49,-79.5 114.3,-83.31 114.3,-92.2 113.03,-93.47 DD27.5
  Bottom 0.406: DD28.5 120.65,-94.74 118.11,-94.74 115.57,-93.47 DD27.5 107.95,-94.74 105.41,-94.74 102.87,-93.47 DD26.5 95.25,-94.74 92.71,-94.74 90.17,-93.47 DD25.5 82.55,-94.74 80.01,-94.74 77.47,-93.47 DD24.5 69.85,-94.74 67.31,-94.74 64.77,-93.47 DD23.5 57.15,-94.74 54.61,-94.74 52.07,-93.47 DD22.5 44.45,-94.74 41.91,-94.74 39.37,-93.47 DD21.5 31.75,-94.74 29.21,-94.74 26.67,-93.47 DD102.5 19.05,-94.74 16.51,-94.74 13.97,-93.47 DD103.5 6.35,-94.74 3.81,-94.74 1.27,-93.47 DD104.5
MA1
  Top 0.406: DD15.9 109.22,-98.55 DD27.7
  Bottom 0.406: DD28.7 120.65,-99.82 118.11,-99.82 115.57,-98.55 DD27.7 107.95,-99.82 105.41,-99.82 102.87,-98.55 DD26.7 95.25,-99.82 92.71,-99.82 90.17,-98.55 DD25.7 82.55,-99.82 80.01,-99.82 77.47,-98.55 DD24.7 69.85,-99.82 67.31,-99.82 64.77,-98.55 DD23.7 57.15,-99.82 54.61,-99.82 52.07,-98.55 DD22.7 44.45,-99.82 41.91,-99.82 39.37,-98.55 DD21.7 31.75,-99.82 29.21,-99.82 26.67,-98.55 DD102.7 19.05,-99.82 16.51,-99.82 13.97,-98.55 DD103.7 6.35,-99.82 3.81,-99.82 1.27,-98.55 DD104.7
MA2  (1 unrouted)
  Top 0.406: DD16.7 111.76,-55.37 113.03,-56.64 113.03,-80.77 115.57,-83.31 115.57,-96.01
  Bottom 0.406: DD28.6 120.65,-97.28 118.11,-97.28 115.57,-96.01 DD27.6 107.95,-97.28 105.41,-97.28 102.87,-96.01 DD26.6 95.25,-97.28 92.71,-97.28 90.17,-96.01 DD25.6 82.55,-97.28 80.01,-97.28 77.47,-96.01 DD24.6 69.85,-97.28 67.31,-97.28 64.77,-96.01 DD23.6 57.15,-97.28 54.61,-97.28 52.07,-96.01 DD22.6 44.45,-97.28 41.91,-97.28 39.37,-96.01 DD21.6 31.75,-97.28 29.21,-97.28 26.67,-96.01 DD102.6 19.05,-97.28 16.51,-97.28 13.97,-96.01 DD103.6 6.35,-97.28 3.81,-97.28 1.27,-96.01 DD104.6
MA3  (1 unrouted)
  Top 0.406: DD16.9 109.22,-59.18 106.68,-61.72 106.68,-80.77 104.14,-83.31 104.14,-91.69 103.38,-92.46
  Bottom 0.406: DD28.12 130.81,-93.47 128.27,-92.2 123.19,-92.2 DD27.12 118.11,-93.47 115.57,-92.2 110.49,-92.2 DD26.12 105.41,-93.47 102.87,-92.2 97.79,-92.2 DD25.12 92.71,-93.47 90.17,-92.2 85.09,-92.2 DD24.12 80.01,-93.47 77.47,-92.2 72.39,-92.2 DD23.12 67.31,-93.47 64.77,-92.2 59.69,-92.2 DD22.12 54.61,-93.47 52.07,-92.2 46.99,-92.2 DD21.12 41.91,-93.47 39.37,-92.2 34.29,-92.2 DD102.12 29.21,-93.47 26.67,-92.2 21.59,-92.2 DD103.12 16.51,-93.47 13.97,-92.2 8.89,-92.2 DD104.12
MA4  (1 unrouted)
  Top 0.406: DD17.7 111.76,-42.67 113.03,-43.94 113.03,-54.1 115.57,-56.64 115.57,-82.04 116.84,-83.31 116.84,-94.74
  Bottom 0.406: DD28.11 130.81,-96.01 128.27,-94.74 123.19,-94.74 DD27.11 118.11,-96.01 115.57,-94.74 110.49,-94.74 DD26.11 105.41,-96.01 102.87,-94.74 97.79,-94.74 DD25.11 92.71,-96.01 90.17,-94.74 85.09,-94.74 DD24.11 80.01,-96.01 77.47,-94.74 72.39,-94.74 DD23.11 67.31,-96.01 64.77,-94.74 59.69,-94.74 DD22.11 54.61,-96.01 52.07,-94.74 46.99,-94.74 DD21.11 41.91,-96.01 39.37,-94.74 34.29,-94.74 DD102.11 29.21,-96.01 26.67,-94.74 21.59,-94.74 DD103.11 16.51,-96.01 13.97,-94.74 8.89,-94.74 DD104.11
MA5  (1 unrouted)
  Top 0.406: DD17.9 109.22,-47.75 105.41,-51.56 105.41,-80.77 101.6,-84.58 101.6,-97.28
  Bottom 0.406: DD28.10 130.81,-98.55 128.27,-97.28 123.19,-97.28 DD27.10 118.11,-98.55 115.57,-97.28 110.49,-97.28 DD26.10 105.41,-98.55 102.87,-97.28 97.79,-97.28 DD25.10 92.71,-98.55 90.17,-97.28 85.09,-97.28 DD24.10 80.01,-98.55 77.47,-97.28 72.39,-97.28 DD23.10 67.31,-98.55 64.77,-97.28 59.69,-97.28 DD22.10 54.61,-98.55 52.07,-97.28 46.99,-97.28 DD21.10 41.91,-98.55 39.37,-97.28 34.29,-97.28 DD102.10 29.21,-98.55 26.67,-97.28 21.59,-97.28 DD103.10 16.51,-98.55 13.97,-97.28 8.89,-97.28 DD104.10
MA6  (1 unrouted)
  Top 0.406: DD18.7 111.76,-28.7 113.03,-29.97 116.84,-29.97 118.11,-31.24 118.11,-78.23 121.92,-82.04 121.92,-88.39
  Bottom 0.406: DD28.13 130.81,-90.93 128.27,-89.66 123.19,-89.66 DD27.13 118.11,-90.93 115.57,-89.66 110.49,-89.66 DD26.13 105.41,-90.93 102.87,-89.66 97.79,-89.66 DD25.13 92.71,-90.93 90.17,-89.66 85.09,-89.66 DD24.13 80.01,-90.93 77.47,-89.66 72.39,-89.66 DD23.13 67.31,-90.93 64.77,-89.66 59.69,-89.66 DD22.13 54.61,-90.93 52.07,-89.66 46.99,-89.66 DD21.13 41.91,-90.93 39.37,-89.66 34.29,-89.66 DD102.13 29.21,-90.93 26.67,-89.66 21.59,-89.66 DD103.13 16.51,-90.93 13.97,-89.66 8.89,-89.66 DD104.13
MA7  (1 unrouted)
  Top 0.406: DD18.9 109.22,-35.05 104.14,-40.13 104.14,-75.69 96.52,-83.31 96.52,-101.09
  Bottom 0.406: DD28.9 130.81,-101.09 128.27,-99.82 123.19,-99.82 DD27.9 118.11,-101.09 115.57,-99.82 110.49,-99.82 DD26.9 105.41,-101.09 102.87,-99.82 97.79,-99.82 DD25.9 92.71,-101.09 90.17,-99.82 85.09,-99.82 DD24.9 80.01,-101.09 77.47,-99.82 72.39,-99.82 DD23.9 67.31,-101.09 64.77,-99.82 59.69,-99.82 DD22.9 52.07,-99.82 46.99,-99.82 DD21.9 41.91,-101.09 39.37,-99.82 34.29,-99.82 DD102.9 29.21,-101.09 26.67,-99.82 21.59,-99.82 DD103.9 16.51,-101.09 13.97,-99.82 8.89,-99.82 DD104.9
MD0  (2 unrouted)
  Bottom 0.406: DD21.2 DD21.14
MD1  (2 unrouted)
  Bottom 0.406: DD22.2 DD22.14
MD2  (2 unrouted)
  Bottom 0.406: DD23.2 DD23.14
MD3  (2 unrouted)
  Bottom 0.406: DD24.2 DD24.14
MD4  (2 unrouted)
  Bottom 0.406: DD25.2 DD25.14
MD5  (2 unrouted)
  Bottom 0.406: DD26.2 DD26.14
MD6  (2 unrouted)
  Bottom 0.406: DD27.2 DD27.14
MD7  (2 unrouted)
  Bottom 0.406: DD28.2 DD28.14
N$1  (1 unrouted)
N$2  (2 unrouted)
N$3  (2 unrouted)
N$4  (1 unrouted)
N$5  (2 unrouted)
N$6  (3 unrouted)
N$7  (2 unrouted)
N$8  (2 unrouted)
N$9  (1 unrouted)
N$10  (1 unrouted)
N$11  (1 unrouted)
N$12  (1 unrouted)
N$13  (1 unrouted)
N$14  (1 unrouted)
N$15  (1 unrouted)
N$16  (2 unrouted)
N$17  (1 unrouted)
N$18  (4 unrouted)
N$19  (2 unrouted)
N$20  (1 unrouted)
N$21  (2 unrouted)
N$22  (2 unrouted)
N$23  (1 unrouted)
N$24  (1 unrouted)
N$25  (1 unrouted)
N$26  (2 unrouted)
N$27  (4 unrouted)
N$28  (1 unrouted)
N$29  (1 unrouted)
  Bottom 0.406: 151.13,-49.02 151.13,-46.48 153.54,-46.48 RD1.1 | 151.13,-49.02 DD2.15 | DD2.9 135.89,-49.02 138.43,-49.02 | 138.43,-49.02 DD2.10 | DD2.11 140.97,-49.02 | 140.97,-49.02 138.43,-49.02 | 140.97,-49.02 151.13,-49.02 | 153.67,-46.48 RD1.1 | RD1.1 DD2.1
N$31  (5 unrouted)
N$32  (1 unrouted)
N$33  (2 unrouted)
N$34  (1 unrouted)
N$35  (2 unrouted)
N$36  (1 unrouted)
N$37  (1 unrouted)
N$38  (6 unrouted)
N$39  (2 unrouted)
N$40  (2 unrouted)
N$41  (3 unrouted)
N$42
  Top 0.406: DD110.9 0,-52.83 1.27,-54.1 6.35,-54.1 7.62,-52.83 DD110.12
  Bottom 0.406: DD110.6 DD110.9 | DD110.1 12.7,-45.21 7.62,-50.29 DD110.12
N$43
  Bottom 0.406: DD109.2 10.16,-57.91 11.43,-59.18 11.43,-65.53 12.7,-66.8 16.51,-66.8 17.78,-68.07 DD108.2
N$44  (1 unrouted)
N$45
  Bottom 0.406: DD108.5 10.16,-68.07 8.89,-66.8 8.89,-61.72 7.62,-60.45 DD109.3
N$46
  Bottom 0.406: DD108.6 7.62,-68.07 6.35,-66.8 6.35,-61.72 5.08,-60.45 DD109.4
N$48  (1 unrouted)
N$49  (2 unrouted)
N$50
  Bottom 0.406: DD110.5 2.54,-45.21 3.81,-46.48 10.16,-46.48 11.43,-45.21 11.43,-42.67 12.7,-41.4 13.97,-41.4 13.97,-45.21 8.89,-50.29 8.89,-59.18 10.16,-60.45 DD109.13
N$51
  Bottom 0.406: DD109.12 7.62,-61.72 6.35,-60.45 6.35,-50.29 5.08,-49.02 3.81,-49.02 3.81,-52.83 2.54,-54.1 -1.27,-54.1 -2.54,-52.83 DD110.8
N$52
  Bottom 0.406: DD110.11 5.08,-52.83 3.81,-54.1 3.81,-61.72 5.08,-62.99 DD109.11
N$53  (2 unrouted)
N$54
  Bottom 0.406: R101.1 3.81,-35.05 6.35,-37.59 6.35,-40.13 5.08,-41.4 DD110.4
N$55
  Bottom 0.406: R102.1 1.27,-41.4 1.27,-47.75 2.54,-49.02 DD110.10
N$56
  Bottom 0.406: R103.1 3.81,-29.97 6.35,-32.51 6.35,-36.32 7.62,-37.59 7.62,-40.13 16.51,-40.13 16.51,-46.48 10.16,-50.29 DD110.13
N$57  (1 unrouted)
N$65  (1 unrouted)
N$66  (1 unrouted)
N$69  (1 unrouted)
P16  (1 unrouted)
P17  (1 unrouted)
P18  (1 unrouted)
P19  (1 unrouted)
P20  (1 unrouted)
P21  (1 unrouted)
P22  (1 unrouted)
P23  (1 unrouted)
P24  (1 unrouted)
Q3  (3 unrouted)
R  (1 unrouted)
R0
  Top 0.406: DD108.3 15.24,-73.15 16.51,-74.42 16.51,-79.5 17.78,-80.77 24.13,-80.77 27.94,-84.58 27.94,-87.12 29.21,-88.39 DD102.14
R2  (1 unrouted)
RD  (2 unrouted)
RES  (1 unrouted)
  Bottom 0.406: DD112.35 33.02,-35.05 34.29,-33.78 48.26,-33.78 49.53,-35.05 DD30.35
RES80  (1 unrouted)
SNY  (1 unrouted)
U7  (1 unrouted)
VCC  (5 unrouted)
  Bottom 0.406: DD112.26 33.02,-57.91 34.29,-56.64 48.26,-56.64 49.53,-57.91 DD30.26
VD0  (1 unrouted)
VD1  (1 unrouted)
VD2  (1 unrouted)
VD3  (1 unrouted)
VD4  (1 unrouted)
VD5  (1 unrouted)
VD6  (1 unrouted)
VD7  (1 unrouted)
VID  (5 unrouted)
  Bottom 0.406: -16.51,-56.64 -16.51,-120.14 187.96,-120.14 187.96,-35.05 | DD110.3 DD110.2
(copper drawn outside any net)
  shapes: Top area x2

## Text on the board
bPlace: 220х135 вост экс нов | 21x13